# Altium PCB FEU31_Part2.PcbDoc
Units mm, origin at the board's own origin, x right, y up, seen from the top; angles counter-clockwise.
Board outline 22 x 22 mm, 2 copper layers (Top Layer, Bottom Layer), stack 1.021 mm thick; 25 components, 25 nets, 63 pads, 33 vias.
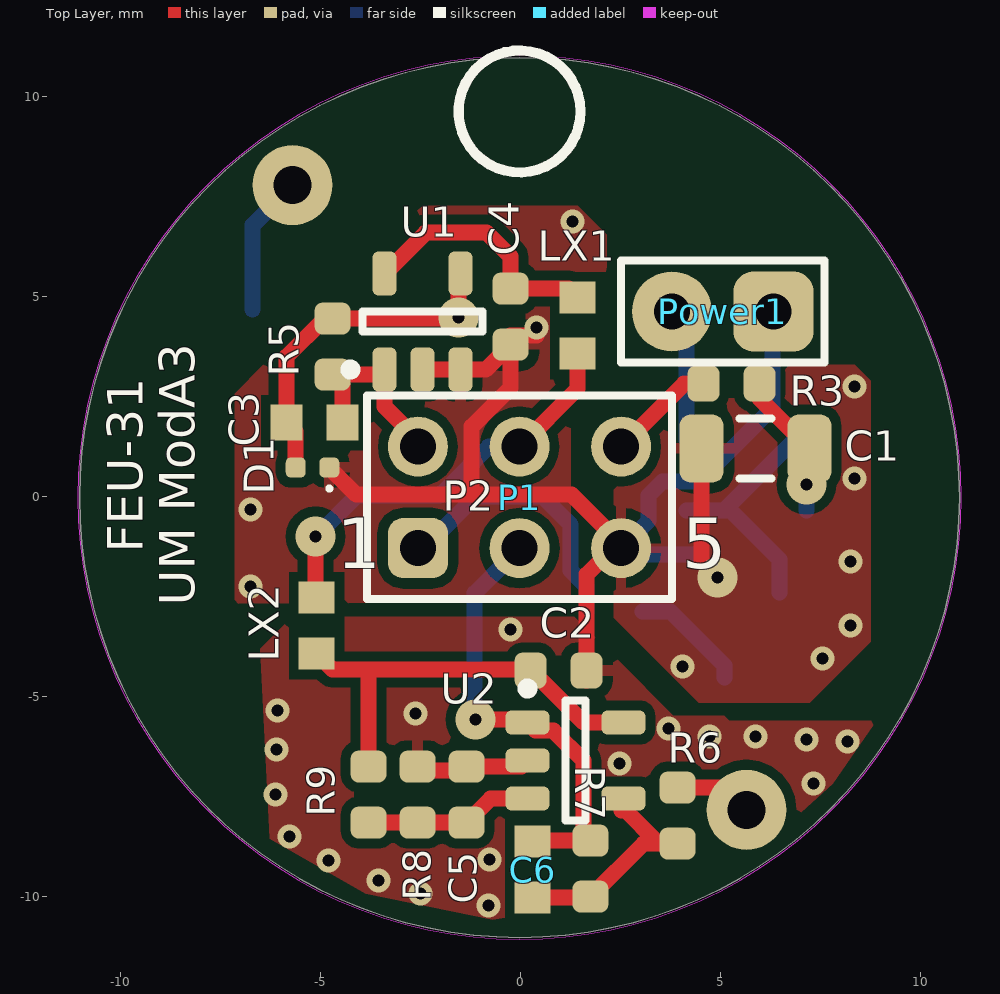
[diagram p0: Top Layer view]
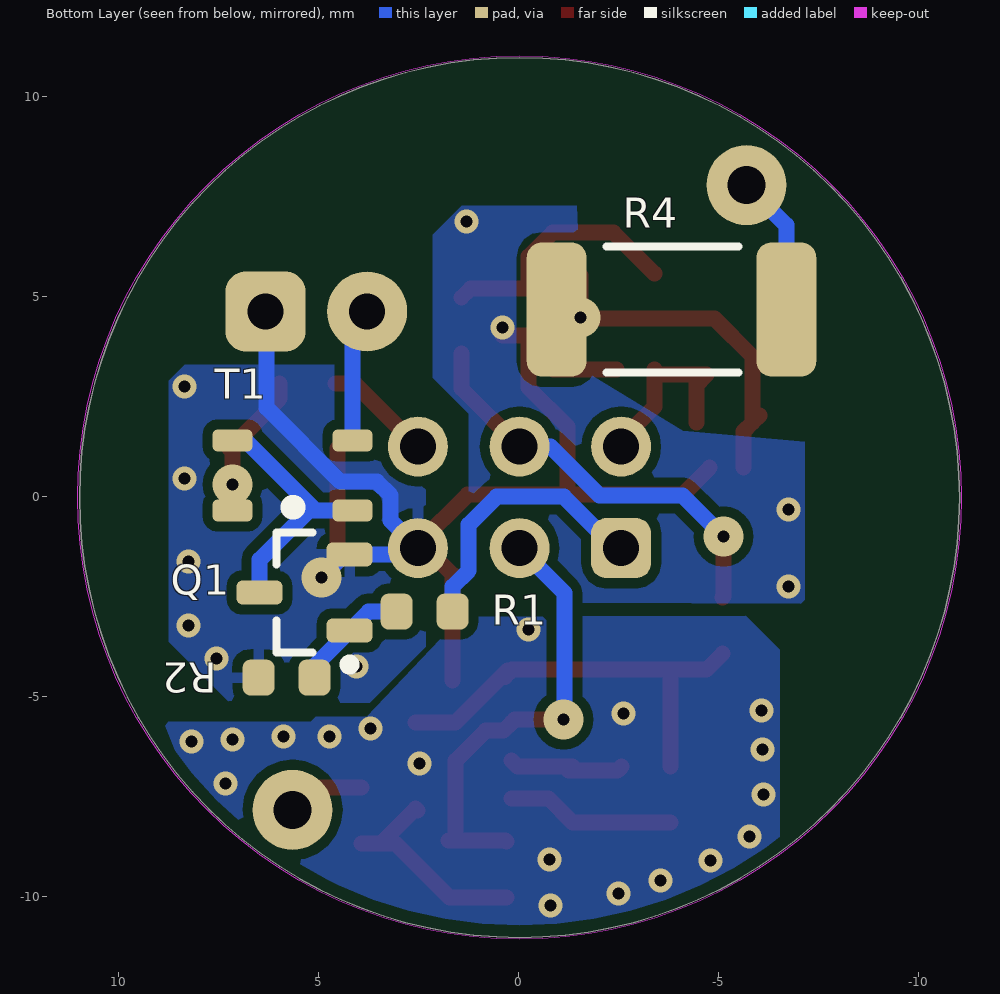
[diagram p1: Bottom Layer view, seen from below]
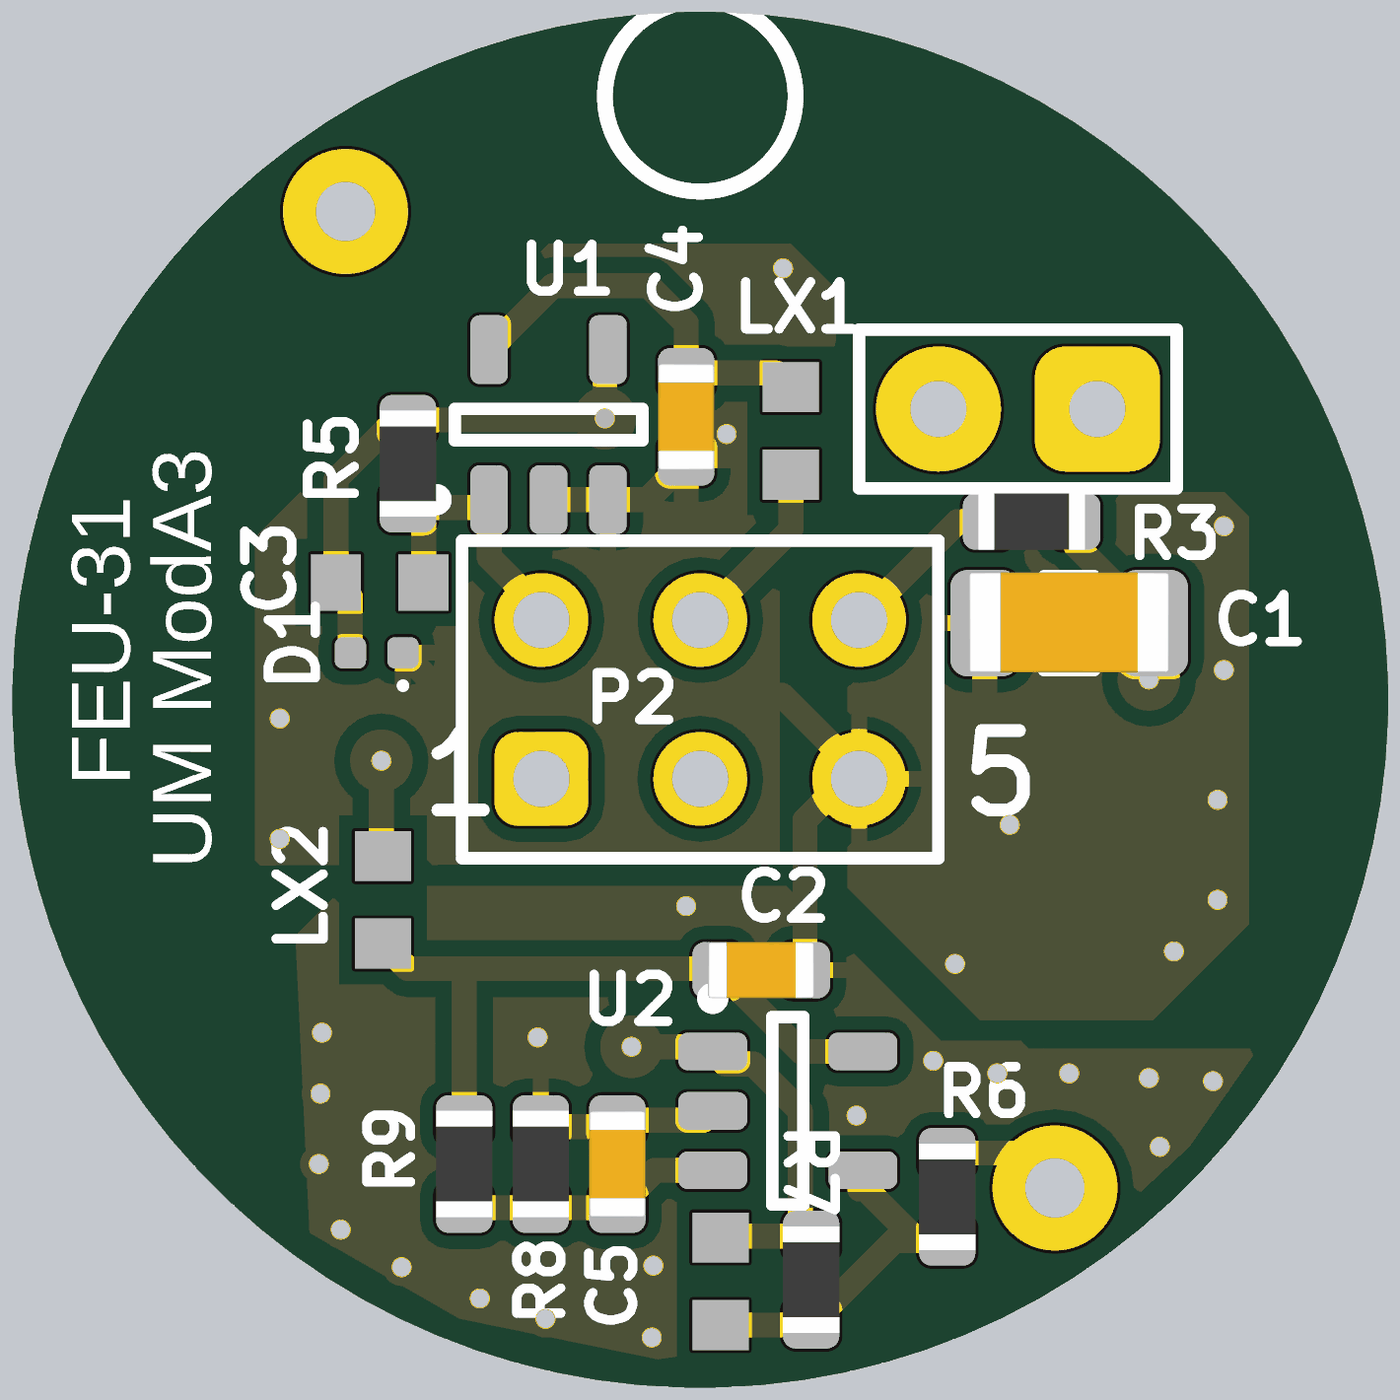
[diagram p2: 3D render of the assembled board from above, using the file's embedded part models]

## Layer stack, top to bottom
Top Solder: solder mask 0.0102, Solder Resist, Dk 3.5
Top Layer: signal copper 0.0356
Dielectric1: dielectric 0.95, FR-4, Dk 4.8
Bottom Layer: signal copper 0.0356
Bottom Solder: solder mask 0.0102, Solder Resist, Dk 3.5

## Board outline
-11.025,-0.025 ccw(c-0.025,-0.025) -0.025,-11.025 ccw(c-0.025,-0.025) 10.975,-0.025 ccw(c-0.025,-0.025) -0.025,10.975 ccw(c-0.025,-0.025)

## Design rules (kind name [scope] priority, off if disabled: settings)
Clearance [All] p1: gap=0.25
ComponentClearance [All] p1: gap=0.1 collisioncheckmode=3 verticalgap=0.254 showdistances=TRUE
HoleSize [All] p1: absolutevalues=TRUE maxlimit=2.54 minlimit=0.3 maxpercent=80.000 minpercent=20.000
HoleToHoleClearance [All] p1: gap=0.2 allowstackedmicrovias=TRUE
MinimumAnnularRing [All] p1: minimumring=0.3
MinimumSolderMaskSliver [All] p1: minsoldermaskwidth=0.152
PlaneClearance [All] p1: clearance=2
PlaneConnect [All] p1: planeconnectstyle=Relief reliefexpansion=0.457 reliefentries=4 reliefconductorwidth=0.3 reliefairgap=0.457
PolygonConnect PolygonConnect_via [IsVia] p1: connectstyle=Direct reliefconductorwidth=0.254 reliefentries=4 polygonreliefangle="90 Angle" airgapwidth=0.254
PolygonConnect [All] p2: connectstyle=Relief reliefconductorwidth=0.254 reliefentries=4 polygonreliefangle="90 Angle" airgapwidth=0.254
RoutingVias [All] p1: holewidth=0.3 width=0.62 viastyle="Through Hole" minholewidth=0.3 minwidth=0.62 maxholewidth=6 maxwidth=4
SilkToSilkClearance [All] p1: silktosilkclearance=0.152
SilkToSolderMaskClearance SilkscreenOverComponentPads [IsPad] p1: minsilkscreentomaskgap=0.1 clearancetoexposedcopper=TRUE
SolderMaskExpansion [All] p1: expansion=0.05
Width [All] p1: maxlimit=2.254 minlimit=0.4 preferedwidth=0.4
22 further rules are at their usual default settings.

## Components (designator, comment, footprint, x,y, rotation, side; value= is the part's Value field where it differs from the comment)
C1 "4.7uF" C1206 5.875,1.2 r180 top
C2 "1uF" 1608[0603]_CAP 0.95,-4.35 r0 top
C3 "10pF" 1608[0603] -5.15,1.85 r0 top
C4 "1uF" 1608[0603]_CAP -0.25,4.5 r270 top
C5 "100nF" 1608[0603]_CAP -1.35,-7.45 r90 top
C6 "2.2pF" 1608[0603] 0.3,-9.325 r90 top
D1 "ESD9R3.3ST5G" ONSC-SOD-923-2-514AB-01_V -5.2,0.725 r180 top
LX1 "2.2uH" 1608[0603] 1.425,4.275 r90 top
LX2 "2.2uH" 1608[0603] -5.1,-3.225 r270 top
P1 "Header 5X2" ФЭУ-31 -0.025,-0.025 r90 top locked
P2 "Header 3X2" HDR2X3 -2.565,-1.29 r0 top locked
Power1 "Header 2" HDR1X2 6.325,4.625 r180 top locked
Q1 "IRLML6344" SOT-23_N 5.35,-2.4 r0 bottom
R1 "100R" 1608[0603]_RES 2.35,-2.875 r0 bottom
R2 "47k" 1608[0603]_RES 5.8,-4.525 r180 bottom
R3 "12R" 1608[0603]_RES 5.275,2.825 r180 top
R4 "5G" HVF2512T5007FE -3.825,4.675 r0 bottom
R5 "5.1M" 1608[0603]_RES -4.7,3.75 r270 top
R6 "150K" 1608[0603]_RES 3.925,-7.975 r90 top
R7 "33k" 1608[0603]_RES 1.749,-9.301 r90 top
R8 "6R" 1608[0603]_RES -2.575,-7.45 r270 top
R9 "3.92K" 1608[0603]_RES -3.8,-7.45 r90 top
T1 "ATB322515-0110" ATB322515-0110 7.15,1.4 r180 bottom
U1 "AD8541ARTZ" ADI-RJ-5_N -2.45,4.375 r90 top
U2 "OPA353NA" ADI-RJ-5_N 1.375,-6.6 r0 top

## Footprints (in the part's own frame and the unit in brackets; to place one, negate y for a bottom-side part, rotate by r counter-clockwise, add the part's x,y. Pads: shape width x height; smd on the part's side, far side on the other; paste and mask are expansions set on the pad)
1608[0603] [mm] "Chip Capacitor, Body 1.6x0.8mm, IPC High Density"
  rect 0.8x0.9 smd: 1(-0.7,0) 2(0.7,0)
  body extent -0.87,-0.48 0.87,0.48, height 1.3
1608[0603]_CAP [mm] "Chip Capacitor, Body 1.6x0.8mm, IPC High Density"
  rrect50% 0.8x0.9 smd: 1(-0.7,0) 2(0.7,0)
  body extent -0.85,-0.45 0.85,0.45, height 0.8
1608[0603]_RES [mm] "Chip Capacitor, Body 1.6x0.8mm, IPC High Density"
  rrect50% 0.8x0.9 smd: 1(-0.7,0) 2(0.7,0)
  body extent -0.85,-0.45 0.85,0.45, height 0.45
ADI-RJ-5_N [mm] "SOT-23, 5-Leads, Body 2.9x1.6mm, Pitch 0.95mm, IPC Medium Density"
  rrect50% 1.1x0.6 smd: 1(-1.2,0.95) 2(-1.2,0) 3(-1.2,-0.95) 4(1.2,-0.95) 5(1.2,0.95)
  silkscreen extent -1.32,-1.5 0.25,1.92, body extent -0.85,-1.5 0.85,1.5, height 1.45
ATB322515-0110 [mm]
  rrect50% 1x0.55 smd: 1(0,-1.75) 2(0,0) 3(3,0) 4(3,-1.75)
  silkscreen extent 1.5,-1.68 1.52,-1.66, body extent -0.1,-2.15 3.1,0.35, height 1.55
C1206 [mm] "Chip Capacitor, Body 3.2x1.6mm, IPC High Density"
  rrect50% 1.1x1.7 smd: 1(-1.35,0) 2(1.35,0)
  silkscreen extent -0.4,-0.75 0.4,0.75, body extent -1.6,-0.81 1.6,0.79, height 1.6
HDR1X2 [mm] "Connector; Header; 2 Position"
  rrect50% 2x2 hole 0.9: 1(0,0)
  round 2 hole 0.9: 2(2.54,0)
  silkscreen extent -1.27,-1.27 3.81,1.27
HDR2X3 [mm] "Connector; Header; 3x2 Position"
  rrect50% 1.5x1.5 hole 0.9: 1(0,0)
  round 1.5 hole 0.9: 2(0,2.54) 3(2.54,0) 4(2.54,2.54) 5(5.08,0) 6(5.08,2.54)
  silkscreen extent -1.27,-1.27 6.35,3.81
HVF2512T5007FE [mm] "Chip Resistor, 2-Leads, Body 7,31x3,20mm, IPC Low Density"
  rrect50% 1.5x3.35 smd: 1(-2.87,0) 2(2.87,0)
  silkscreen extent -1.68,-1.58 1.62,1.57, body extent -3.68,-1.6 3.63,1.6, height 0.82
ONSC-SOD-923-2-514AB-01_V [mm] "SOD, 2-Leads, Body 0.8x0.6mm"
  rrect50% 0.5x0.5 smd: 1(-0.42,0) 2(0.42,0)
  silkscreen extent -0.47,0.48 -0.37,0.57, body extent -0.4,-0.3 0.4,0.3, height 0.4
SOT-23_N [mm] "SOT23, 3-Leads, Body 2.9x1.3mm, Pitch 0.95mm, Lead Span 2.3mm, IPC Medium Density"
  rrect50% 1.15x0.6 smd: 1(-1.125,0.95) 2(-1.125,-0.95) 3(1.125,0)
  silkscreen extent -1.25,-1.5 0.7,1.92, body extent -0.7,-1.5 0.7,1.5, height 1.11
ФЭУ-31 [mm]
  round 2 hole 0.95: 5(-7.809,-5.673) 10(7.809,5.673)
  silkscreen extent 8.13,-1.52 11.18,1.52

## Part data
C1 C2 C3 C4 C5 C6: library part "Cap Semi", "Capacitor (Semiconductor SIM Model)"
D1: "Transient Voltage Suppressor, ESD Protection Diode with Ultra-Low Leakage, 2-Pin SOD-923, Pb-Free, Tape and Reel"
LX1 LX2 R1 R2 R3 R4 R5 R6 R7 R8 R9: library part "Resistor 0805"
P1: "Header, 5-Pin, Dual row"
P2: "Header, 3-Pin, Dual row"
Power1: "Header, 2-Pin"
Q1: library part IRLML2402, "HEXFET Power MOSFET"
U1 U2: library part AD8541ARTZ-R2, "Single Channel RRIO Operational Amplifier, 1 MHz BW, 920 mV/us SR, Industrial, 5-pin SOT23 (RJ-5), Reel"

## Via types
v1: diameter 0.6, hole 0.3, Top Layer to Bottom Layer, tented both sides, 28 vias
v2: diameter 1, hole 0.3, Top Layer to Bottom Layer, tented both sides, 5 vias

## Nets (pads, with @x,y where several pads share a name; then routed paths per layer and width w, separated by ;. In a path a pad name is that pad's centre, name@x,y a point inside that pad or via, vN(x,y) a via of type N, cw(c..) or ccw(c..) an arc to the next point about the centre after c; other vN are vias at no path point)
4.5MV: C5.1 R8.2 R9.1 U2.3 | length 4.2
  Top Layer w0.4: R9.1 R8.2 C5.1 -0.75,-7.55 U2.3
ANODE: P1.5 R6.2 | length 2
  Top Layer w0.4: R6.2 5.09,-7.275 P1.5
DINODE1: 
DINODE2: 
DINODE3: 
DINODE4: 
DINODE5: 
DINODE6: 
DINODE7: 
DINODE8: 
FOTOKAT: P1.10 R4.1 | length 3.5
  Bottom Layer w0.4: R4.1 -6.695,6.787 P1.10
GND: C1.2 C2.2 C4.2 C5.2 D1.1 P2.5 Power1.1 Q1.2 R2.1 R8.1 U1.2 U1.3 U2.2 | length 36.9
  Top Layer w0.4: D1.1 -4.105,0.05 -1.225,0.05 ; R8.1 -2.475,-6.85 -1.25,-6.85 C5.2 0.025,-6.75 U2.2 ; U1.2 U1.3 -0.875,3.175 C4.2 ; v1(0.396,4.225) 0.4,4.221 0.4,4.025 -0.25,4.025 C4.2 ; C2.2@1.65,-4.6 C2.2 1.65,-1.95 2.31,-1.29 P2.5 2.515,-1.19 1.275,0.05 -1.225,0.05 ; C1.2 4.525,-1.625 v2(4.925,-2.025) ; -1.225,0.05 -1.225,1.747 -0.25,2.722 C4.2
  Bottom Layer w0.4: v2(4.925,-2.025) 4.35,-1.45 Q1.2 2.675,-1.45 P2.5 3.2,-0.605 3.2,0.031 3.544,0.375 4.456,0.375 6.3,2.219 6.3,4.6 Power1.1
  other v1: -0.8,-10.225 -2.5,-9.925 -3.55,-9.6 -4.8,-9.1 -0.775,-9.075 -5.775,-8.5 -6.125,-7.45 7.325,-7.175 2.475,-6.675 -6.1,-6.325 8.175,-6.125 7.15,-6.075 4.725,-6 5.875,-6 3.7,-5.8 -2.625,-5.425 -6.075,-5.35 4.05,-4.25 7.55,-4.05 -0.25,-3.325 8.25,-3.225 -6.75,-2.25 8.25,-1.625 -6.75,-0.325 8.35,0.45 8.35,2.75 1.3,6.875
NetC1_1: C1.1 R3.1 T1.1 | length 3.7
  Top Layer w0.4: R3.1 5.975,2.45 C1.1 7.15,1.125 v2(7.15,0.3)
  Bottom Layer w0.4: T1.1 v2(7.15,0.3)
NetC2_1: C2.1 LX2.2 R9.2 U2.5 | length 11
  Top Layer w0.4: LX2.2 -4.7,-4.325 -3.8,-4.325 ; R9.2 -3.8,-4.325 ; C2.1 0.281,-4.35 1.581,-5.65 U2.5 ; C2.1@0.342,-4.508 0.159,-4.325 -3.8,-4.325
NetC3_1: C3.1 D1.2 R4.2 R5.1 U1.4 | length 8.9
  Top Layer w0.4: C3.1@-6.025,2.025 C3.1 ; D1.2 -5.62,1.62 C3.1 ; v2(-1.55,4.475) -1.575,4.45 R5.1 -4.9,4.45 -5.85,3.5 C3.1 ; v2(-1.55,4.475) -1.55,5.525 U1.4
NetC4_1: C4.1 LX1.2 U1.5 | length 6.6
  Top Layer w0.4: U1.5 -2.375,6.6 -0.85,6.6 -0.25,6 C4.1@-0.25,5.35 ; C4.1@-0.4,5.2 C4.1@-0.25,5.35 ; LX1.2 1.2,5.2 C4.1 C4.1@-0.25,5.35
NetC6_1: C6.1 R6.1 R7.1 U2.4 | length 5.5
  Top Layer w0.4: C6.1 1.724,-10.025 R7.1 3.074,-8.675 3.45,-8.675 ; 2.525,-7.85 2.575,-7.8 3.45,-8.675 ; R6.1 3.45,-8.675
NetQ1_1: Q1.1 R1.2 R2.2 | length 2.9
  Bottom Layer w0.4: R1.2 3.75,-2.875 Q1.1 5.1,-4.225 R2.2
NetQ1_3: Q1.3 T1.2 T1.4 | length 6.5
  Bottom Layer w0.4: T1.4 5.075,-0.35 ; Q1.3 6.475,-1.575 5.25,-0.35 5.075,-0.35 ; T1.2 6.825,1.4 5.075,-0.35
PULSE: P2.1 R1.1 | length 7
  Bottom Layer w0.4: P2.1 -2.421,-1.29 -1.131,0 0.55,0 1.25,-0.7 1.25,-1.85 1.65,-2.25 R1.1
PUMP: Power1.2 T1.3 | length 3.4
  Bottom Layer w0.4: Power1.2 4.15,4.26 T1.3
SIGOUT: C6.2 P2.3 R7.2 U2.1 | length 11.3
  Top Layer w0.4: v2(-1.125,-5.575) 0.1,-5.575 U2.1 0.375,-5.85 0.824,-5.85 1.575,-6.601 R7.2@1.575,-8.601 ; C6.2 0.324,-8.601 R7.2@1.575,-8.601 ; R7.2 R7.2@1.575,-8.601
  Bottom Layer w0.4: v2(-1.125,-5.575) -1.15,-5.55 -1.15,-2.415 P2.3
VCC: LX1.1 LX2.1 P2.4 | length 10.5
  Top Layer w0.4: v2(-5.125,-1) -5.125,-2.5 LX2.1 ; P2.4 1.425,2.7 LX1.1
  Bottom Layer w0.4: v2(-5.125,-1) -4.1,0.025 -2.025,0.025 -0.8,1.25 P2.4
VCC_BAT: P2.6 R3.2 | length 2.7
  Top Layer w0.4: P2.6 4.09,2.825 R3.2
VSENS: C3.2 P2.2 R5.2 U1.1 | length 4.9
  Top Layer w0.4: C3.2 -4.45,2.8 R5.2 -3.525,3.05 U1.1 -3.4,2.25 -2.565,1.415 P2.2

## Polygon pours and split planes (outlines as drawn)
GND on Top Layer "Top Layer-No Net" (solid, pour order 14): 1.25,-2.649 1.25,-0.375 1.25,0.05 1.25,0.675 1.25,2.05 1.25,2.075 2.15,2.975 2.15,6.55 1.425,7.275 -2.45,7.275 -7.15,2.575 -7.15,-2.675
GND on Top Layer "Top Layer-No Net" (solid, pour order 12): 5.099,-5.476 5.224,-5.601 8.899,-5.601 7.8,-7.175 6.425,-8.45 3.7,-9.925 -0.7,-10.575 -3.875,-9.925 -6.275,-8.55 -6.501,-3.801 -5.7,-3 1.349,-3 1.774,-3.426 3.824,-5.476
GND on Top Layer "Top Layer-No Net" (solid, pour order 2): 3.4,3.3 8.35,3.3 8.75,2.9 8.75,-3.625 7.225,-5.15 4.45,-5.15 2.325,-3.025 2.325,2.3 3.325,3.3
GND on Bottom Layer "Top Layer-No Net" (solid, pour order 0): 1.25,-2.649 1.25,-0.375 1.25,0.05 1.25,0.675 1.25,2.05 1.25,2.075 2.15,2.975 2.15,6.55 1.425,7.275 -1.45,7.275 -1.625,3.15 -4.1,1.65 -7.15,1.375 -7.15,-2.675
GND on Bottom Layer "Top Layer-No Net" (solid, pour order 10): 5.075,-5.5 5.2,-5.625 8.875,-5.625 8.05,-7.725 2.87,-10.651 -2.075,-10.95 -4.525,-10.225 -6.525,-9.025 -6.525,-3.825 -5.684,-2.984 1.429,-3.011 3.8,-5.5
GND on Bottom Layer "Top Layer-No Net" (solid, pour order 4): 3.4,3.3 8.35,3.3 8.75,2.9 8.75,-3.625 7.225,-5.15 3.725,-5.15 2.325,-3.75 2.325,2.3 3.325,3.3

## Keep-outs
Keep-Out Layer:
  circle w0.01: c-0.025,-0.025 r11.043

## Silkscreen, mask and mechanical layers (free items; w line width, h text height)
Top Overlay:
  text "FEU-31" at -9.15,-1.4 h1.52 r90
  text "UM ModA3" at -7.85,-2.725 h1.52 r90

## Text inside footprints (layer, text, board x,y; h text height)
P2: Top Overlay "1" at -4.597,-1.798 h1.27; Top Overlay "5" at 4.039,-1.798 h1.27